# Altium PCB Robo Module Interface v1.PcbDoc
Units mm, origin at the board's own origin, x right, y up, seen from the top; angles counter-clockwise.
Board outline 90 x 40 mm, 2 copper layers (Top Layer, Bottom Layer); 8 components, 13 nets, 50 pads, 4 vias.
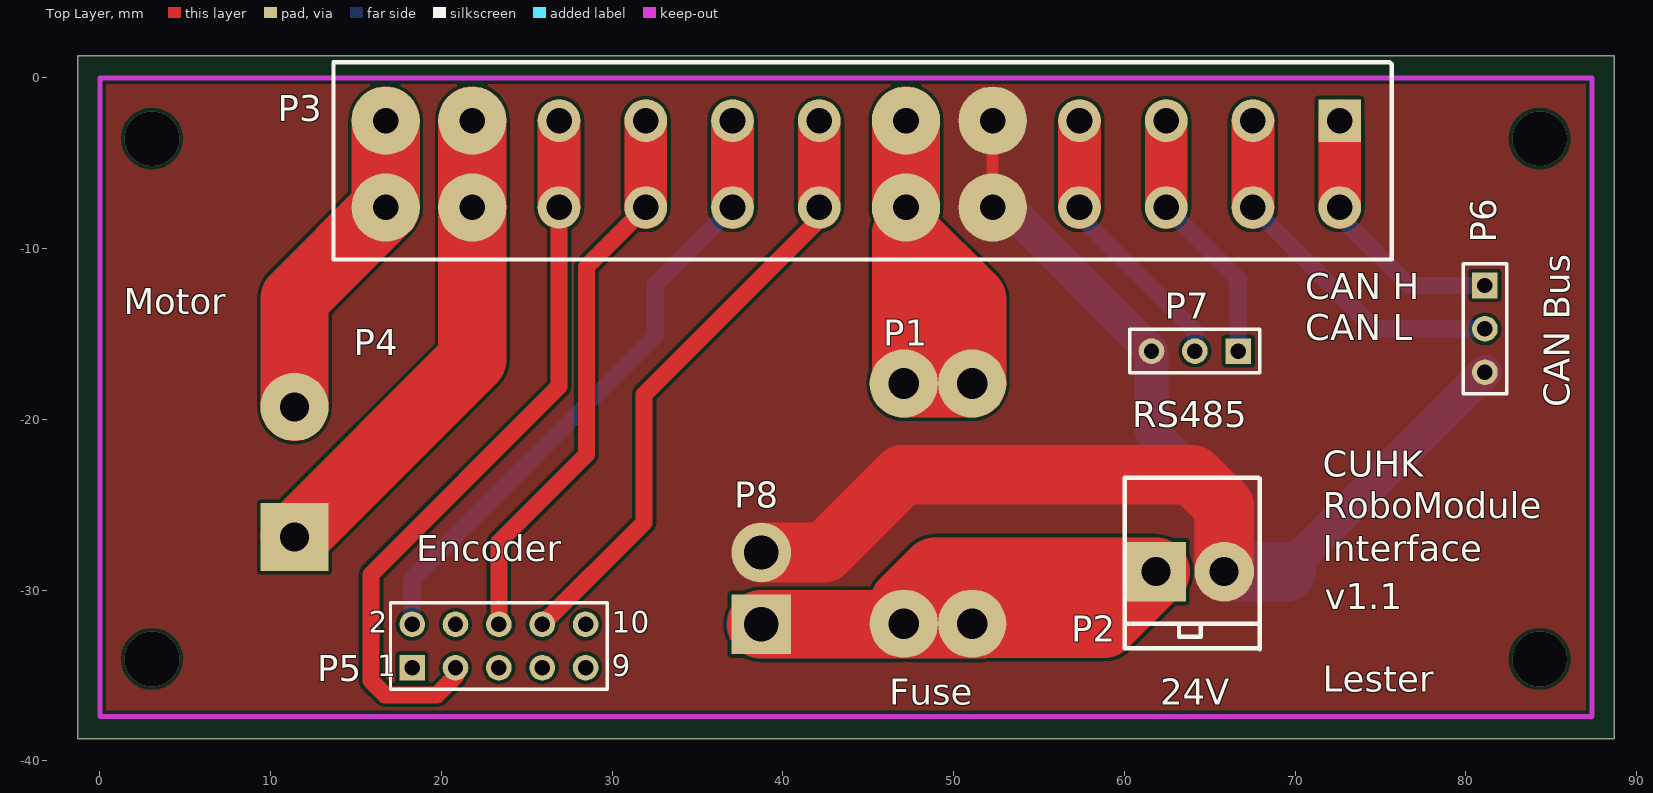
[diagram p0: Top Layer view]
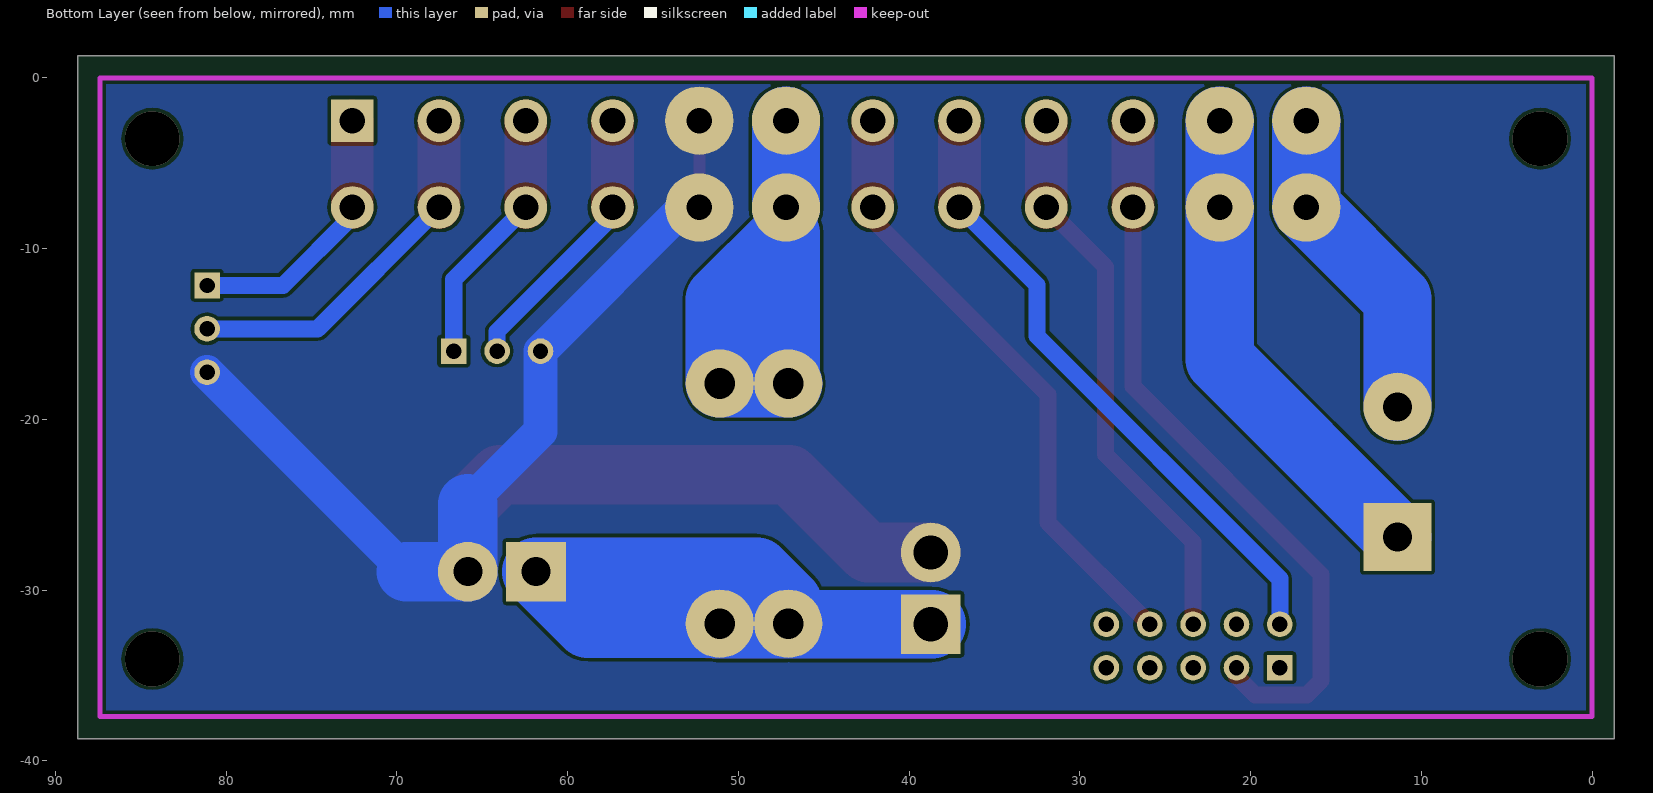
[diagram p1: Bottom Layer view, seen from below]

## Layer stack, top to bottom
Top Solder: solder mask 0.0102, Solder Resist, Dk 3.5
Top Layer: signal copper 0.0356
Dielectric 1: dielectric 0.32, FR-4, Dk 4.8
Bottom Layer: signal copper 0.0356
Bottom Solder: solder mask 0.0102, Solder Resist, Dk 3.5

## Board outline
-1.3,-38.7 88.7,-38.7 88.7,1.3 -1.3,1.3

## Design rules (kind name [scope] priority, off if disabled: settings)
Clearance [All] p1: gap=0.2 ignorepadtopadclearanceinfootprint=FALSE
PolygonConnect [All] p1: connectstyle=Direct reliefconductorwidth=0.254 reliefentries=4 polygonreliefangle="90 Angle" airgapwidth=0.254
RoutingVias [All] p1: holewidth=0.6 width=1 viastyle="Through Hole" minholewidth=0.711 minwidth=1.27 maxholewidth=0.711 maxwidth=1.27
SolderMaskExpansion [All] p1: expansion=0.102
Width [All] p1: maxlimit=10 minlimit=0.2 preferedwidth=0.7
30 further rules are at their usual default settings.

## Components (designator, comment, footprint, x,y, rotation, side; value= is the part's Value field where it differs from the comment)
P1 "Car Fuse" car_fuse 47.087,-17.899 r270 top
P2 "big Pin power port" bigPin_power_port 63.851,-28.921 r90 top
P3 "Robo Module Connector" robomoduleConnector 72.614,-7.585 r270 top
P4 "KF762-p_connector" KF762 11.4,-26.889 r180 top
P5 "Header 5X2" HDR2X5 18.288,-34.544 r0 top
P6 "Header 3" HDR1X3 81.123,-12.157 r270 top
P7 "Header 3" HDR1X3 66.675,-16.002 r180 top
P8 "5557 Connector" 5557_connector 38.735,-32.004 r90 top

## Footprints (in the part's own frame and the unit in brackets; to place one, negate y for a bottom-side part, rotate by r counter-clockwise, add the part's x,y. Pads: shape width x height; smd on the part's side, far side on the other; paste and mask are expansions set on the pad)
5557_connector [mm]
  rect 3.5x3.5 hole 2: 1(0,0)
  round 3.5 hole 2: 2(4.2,0)
bigPin_power_port [mm]
  rect 3.5x3.5 hole 1.7: 1(0,2)
  round 3.5 hole 1.7: 2(0,-2)
  silkscreen extent -4.54,-4.08 5.51,3.82
car_fuse [mm]
  round 4 hole 1.8: 1(0,4) 1(0,0) 2(14.07,0) 2(14.07,4)
HDR1X3 [mm] "Connector; Header; 3 Position"
  rect 1.5x1.5 hole 0.9: 1(0,0)
  round 1.5 hole 0.9: 2(2.54,0) 3(5.08,0)
  silkscreen extent -1.27,-1.27 6.35,1.27
HDR2X5 [mm] "Connector; Header; 5x2 Position"
  rect 1.5x1.5 hole 0.9: 1(0,0)
  round 1.5 hole 0.9: 2(0,2.54) 3(2.54,0) 4(2.54,2.54) 5(5.08,0) 6(5.08,2.54) 7(7.62,0) 8(7.62,2.54) 9(10.16,0) 10(10.16,2.54)
  silkscreen extent -1.27,-1.27 11.43,3.81
KF762 [mm]
  rect 4x4 hole 1.69: 1(0,0)
  round 4 hole 1.69: 2(0,-7.62)
robomoduleConnector [mm]
  rect 2.5x2.5 hole 1.5: 1(-5.08,0)
  round 2.5 hole 1.5: 1(0,0) 2(-5.08,-5.08) 2(0,-5.08) 3(-5.08,-10.16) 3(0,-10.16) 4(-5.08,-15.24) 4(0,-15.24) 7(-5.08,-30.48) 7(0,-30.48) 8(-5.08,-35.56) 8(0,-35.56) 9(-5.08,-40.64) 9(0,-40.64) 10(-5.08,-45.72) 10(0,-45.72)
  round 4 hole 1.5: 5(-5.08,-20.32) 5(0,-20.32) 6(-5.08,-25.4) 6(0,-25.4) 11(-5.08,-50.8) 11(0,-50.8) 12(-5.08,-55.88) 12(0,-55.88)
  silkscreen extent -8.51,-58.93 3.05,3.05

## Part data
P1: library part Component_1
P3: library part robomoduleConnector
P5: "Header, 5-Pin, Dual row", LatestRevisionDate=17-Jul-2002, LatestRevisionNote="Re-released for DXP Platform.", Publisher="Altium Limited"
P6 P7: "Header, 3-Pin", LatestRevisionDate=17-Jul-2002, LatestRevisionNote="Re-released for DXP Platform.", Publisher="Altium Limited"
P8: library part 5557_connector

## Via types
v1: diameter 3.2, hole 3.2, Top Layer to Bottom Layer, 4 vias

## Nets (pads, with @x,y where several pads share a name; then routed paths per layer and width w, separated by ;. In a path a pad name is that pad's centre, name@x,y a point inside that pad or via, vN(x,y) a via of type N, cw(c..) or ccw(c..) an arc to the next point about the centre after c; other vN are vias at no path point)
24V_fused: P1.1 P3.6 | length 58
  Top Layer w0.7: P1.1@47.087,-17.899 P1.1@47.214,-17.772 ; P3.6@47.214,-9.114 P3.6@47.214,-7.585
  Top Layer w4: P1.1@47.087,-17.899 51.087,-17.899 51.087,-12.987 47.214,-9.114 P1.1@47.214,-17.772 ; P3.6@47.214,-7.585 P3.6@47.214,-2.505
  Bottom Layer w4: P1.1@47.087,-17.899 51.087,-17.899 51.087,-12.987 47.214,-9.114 P1.1@47.214,-17.772 ; P3.6@47.214,-7.585 P3.6@47.214,-2.505
485A: P3.3 P7.1 | length 15.2
  Top Layer w2.5: P3.3@62.454,-7.585 P3.3@62.454,-2.505
  Bottom Layer w1: P3.3@62.454,-7.585 66.675,-11.806 P7.1
485B: P3.4 P7.2 | length 16.3
  Top Layer w2.5: P3.4@57.374,-7.585 P3.4@57.374,-2.505
  Bottom Layer w0.7: P3.4@57.374,-8.098 P3.4@57.374,-7.585
  Bottom Layer w1: P3.4@57.374,-8.098 64.135,-14.859 P7.2
CANH: P3.1 P6.1 | length 15.8
  Top Layer w2.5: P3.1@72.614,-7.585 P3.1@72.614,-2.505
  Bottom Layer w0.7: P3.1@72.614,-8.098 P3.1@72.614,-7.585
  Bottom Layer w1: P3.1@72.614,-8.098 76.673,-12.157 P6.1
CANL: P3.2 P6.2 | length 21.6
  Top Layer w2.5: P3.2@67.534,-7.585 P3.2@67.534,-2.505
  Bottom Layer w1: P3.2@67.534,-7.585 74.646,-14.697 P6.2
ENCODER_5V: P3.8 P5.2 | length 37.3
  Top Layer w2.5: P3.8@37.054,-7.585 P3.8@37.054,-2.505
  Bottom Layer w1: P5.2 18.288,-29.337 32.512,-15.113 32.512,-12.127 P3.8@37.054,-7.585
ENCODER_CHA: P3.9 P5.6 | length 33.1
  Top Layer w1: P5.6 23.368,-27.189 28.494,-22.063 28.494,-11.065 P3.9@31.974,-7.585
  Top Layer w2.5: P3.9@31.974,-7.585 P3.9@31.974,-2.505
ENCODER_CHB: P3.7 P5.8 | length 36.2
  Top Layer w1: P5.8 31.877,-26.035 31.877,-18.542 42.134,-8.285 P3.7@42.134,-7.585
  Top Layer w2.5: P3.7@42.134,-7.585 P3.7@42.134,-2.505
ENCODER_GND: P3.10 P5.3 | length 43.6
  Top Layer w1: P5.3 20.828,-35.052 19.745,-36.135 16.704,-36.135 15.875,-35.306 15.875,-29.083 26.894,-18.064 P3.10@26.894,-7.585
  Top Layer w2.5: P3.10@26.894,-7.585 P3.10@26.894,-2.505
GND: P2.2 P3.5 P6.3 P7.3 P8.2 | length 86.3
  Top Layer w0.7: P3.5@52.294,-7.585 P3.5@52.294,-2.505
  Top Layer w3.5: P8.2 42.427,-27.804 46.99,-23.241 64.008,-23.241 65.851,-25.084 P2.2
  Bottom Layer w0.7: 60.711,-16.002 P7.3
  Bottom Layer w2: P3.5@53.183,-7.585 P7.3@61.6,-16.002 ; P7.3 61.595,-20.701 65.851,-24.957 ; 69.439,-28.921 P6.3
  Bottom Layer w3.5: 65.851,-24.957 P2.2 69.439,-28.921
NetP1_2: P1.2 P2.1 P8.1 | length 81.3
  Top Layer w0.7: P1.2@47.052,-32.004 47.087,-31.969 47.087,-31.272 P1.2@47.117,-31.242
  Top Layer w4: P8.1 P1.2@47.052,-32.004 ; P1.2@47.117,-31.242 47.117,-30.734 48.93,-28.921 P2.1 58.803,-31.969 P1.2@51.087,-31.969 ; P1.2@47.498,-32.004 P1.2@51.689,-32.004
  Bottom Layer w4: P8.1@38.673,-32.004 P8.1 P1.2@46.99,-32.004 ; P1.2@47.117,-32.004 P1.2@51.308,-32.004 ; P1.2@47.117,-30.734 48.93,-28.921 P2.1 58.803,-31.969 P1.2@51.087,-31.969
NetP3_11: P3.11 P4.1 | length 57.4
  Top Layer w4: P4.1 21.814,-16.475 21.814,-7.585 P3.11@21.814,-2.505
  Bottom Layer w4: P4.1 21.814,-16.475 21.814,-7.585 P3.11@21.814,-2.505
NetP3_12: P3.12 P4.2 | length 37.9
  Top Layer w4: P4.2 11.4,-12.919 16.734,-7.585 P3.12@16.734,-2.505
  Bottom Layer w4: P4.2 11.4,-12.919 16.734,-7.585 P3.12@16.734,-2.505
pads on no net: P5.1 P5.4 P5.5 P5.7 P5.9 P5.10
copper on no net:
  other v1: 3.048,-34.036 84.328,-34.036 3.048,-3.556 84.328,-3.556

## Polygon pours and split planes (outlines as drawn)
GND on Top Layer "Top Ground Trace" (solid, remove dead copper, pour order 17): -1.3,-38.7 88.7,-38.7 88.7,1.3 -1.3,1.3
GND on Bottom Layer "Bottom Ground Trace" (solid, remove dead copper, pour order 18): -1.3,-38.7 88.7,-38.7 88.7,1.3 -1.3,1.3

## Keep-outs
Keep-Out Layer:
  lines w0.3: 0,-37.4 0,0 87.4,0 87.4,-37.4 0,-37.4

## Silkscreen, mask and mechanical layers (free items; w line width, h text height)
Top Overlay:
  text "CAN H" at 70.612,-12.954 h1.52
  text "Motor" at 1.397,-13.843 h1.52
  text "CAN L" at 70.612,-15.367 h1.52
  text "CAN Bus" at 86.106,-19.304 h1.52 r90
  text "RS485" at 60.452,-20.447 h1.52
  text "CUHK" at 71.628,-23.368 h1.52
  text "RoboModule" at 71.628,-25.781 h1.52
  text "Encoder" at 18.542,-28.321 h1.52
  text "Interface" at 71.628,-28.321 h1.52
  text "v1.1" at 71.755,-31.115 h1.52
  text "Lester" at 71.628,-35.941 h1.52
  text "Fuse" at 46.228,-36.703 h1.52
  text "24V" at 62.103,-36.703 h1.52
  text "CAN L" at 98.933,-79.375 h1.52 r270
  text "CAN H" at 101.473,-79.375 h1.52 r270
  text "CAN L" at 114.427,-80.518 h1.52 r270
  text "CAN H" at 116.967,-80.518 h1.52 r270
Drill Drawing:
  text ".LEGEND" at 93.78,-33.62 h1.52
  text "Drill Drawing." at 93.78,-36.16 h1.52

## Dimensions
0,-37.4 to 0,0 on Mechanical 1
0,-37.4 to 87.4,-37.4 on Mechanical 1

## Text inside footprints (layer, text, board x,y; h text height)
P5: Top Overlay "10" at 29.972,-32.512 h1.27; Top Overlay "9" at 29.972,-35.052 h1.27; Top Overlay "1" at 16.256,-35.052 h1.27; Top Overlay "2" at 15.748,-32.512 h1.27